# Altium PCB LED_PCB_v1.0.PcbDoc
Units mil, origin at the board's own origin, x right, y up, seen from the top; angles counter-clockwise.
Board outline 3006.97 x 2047.24 mil, 2 copper layers (Top Layer, Bottom Layer), stack 61.811 mil thick; 65 components, 63 nets, 179 pads, 111 vias.
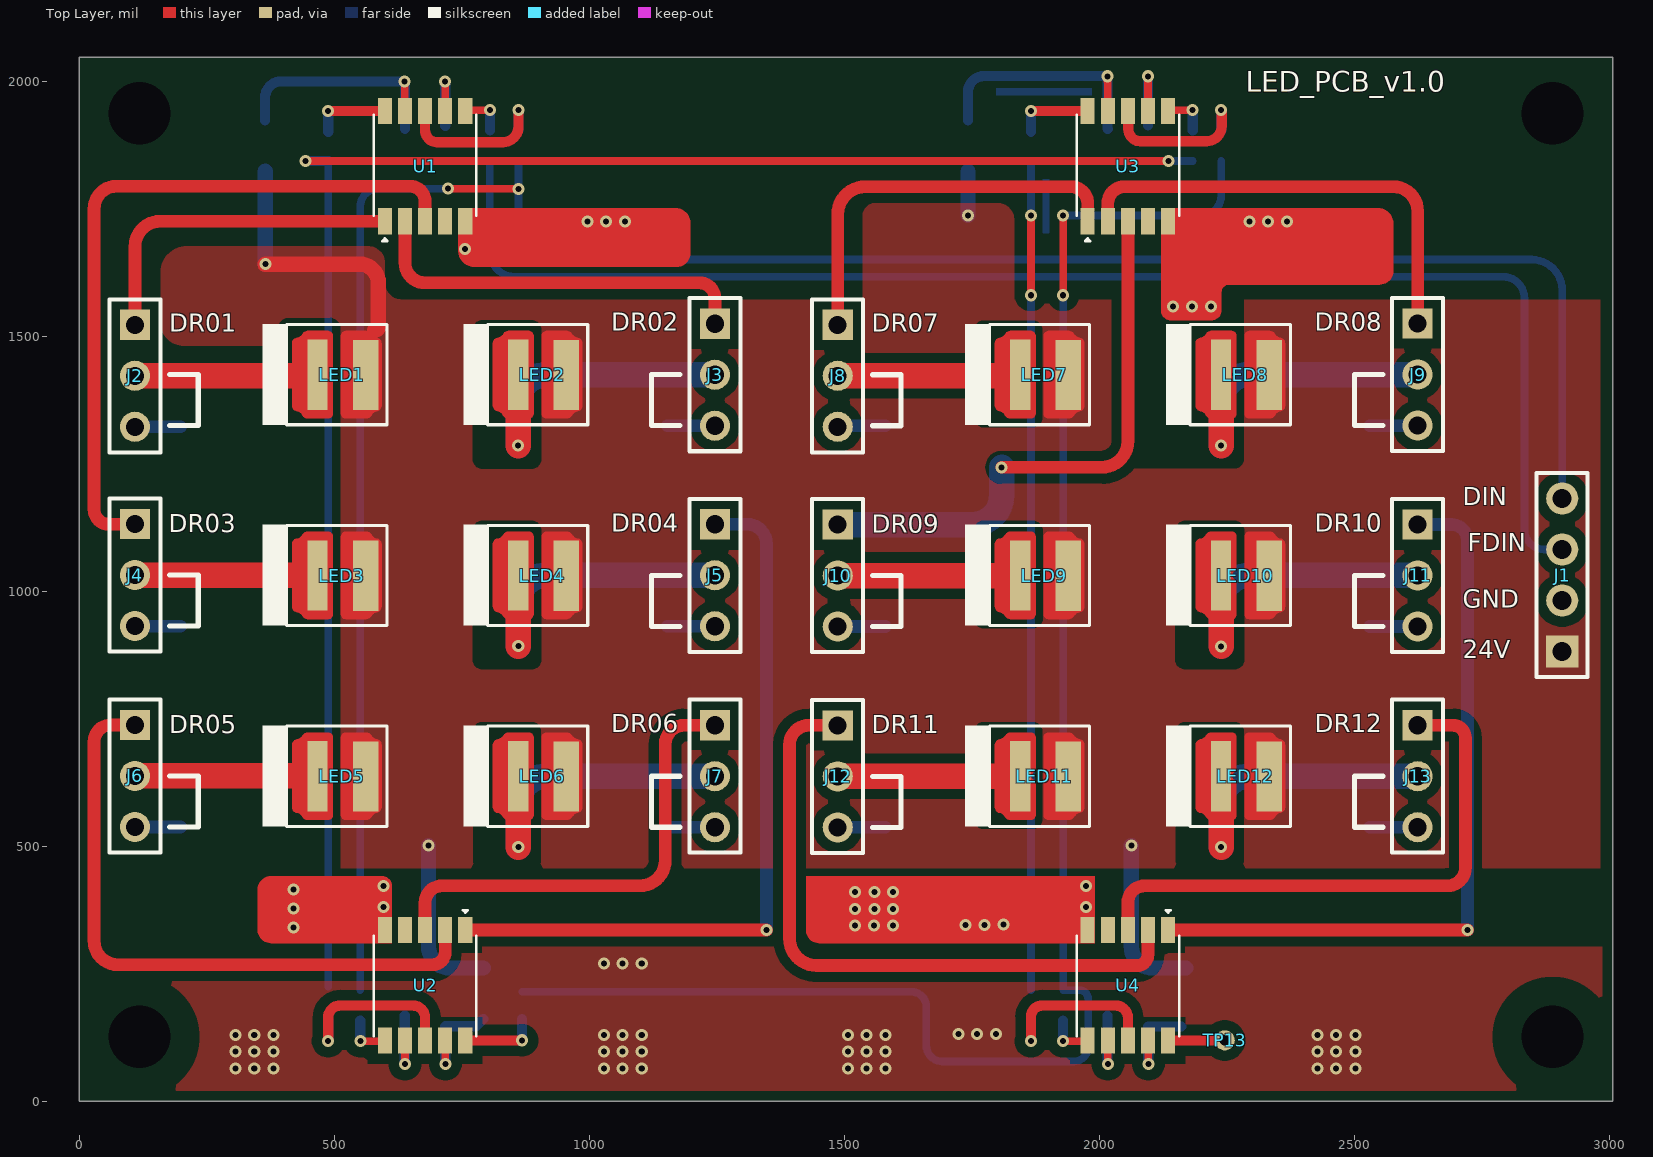
[diagram p0: Top Layer view]
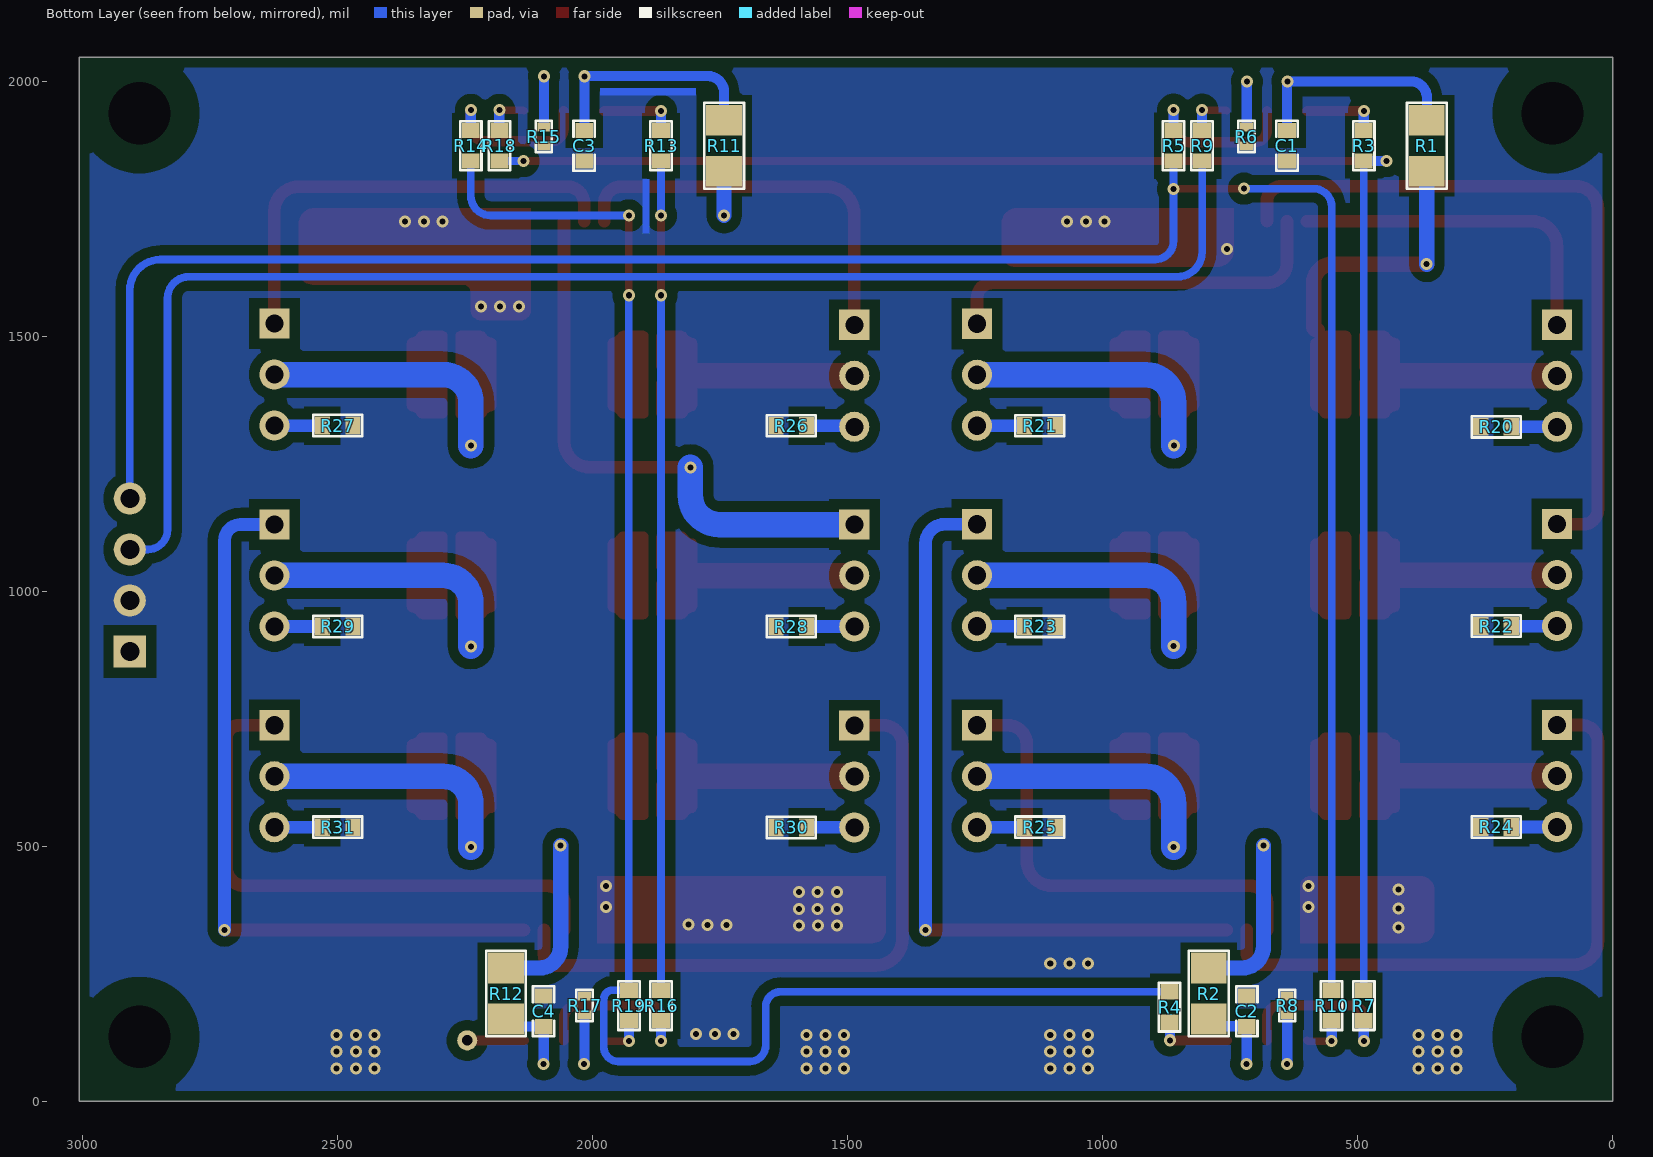
[diagram p1: Bottom Layer view, seen from below]
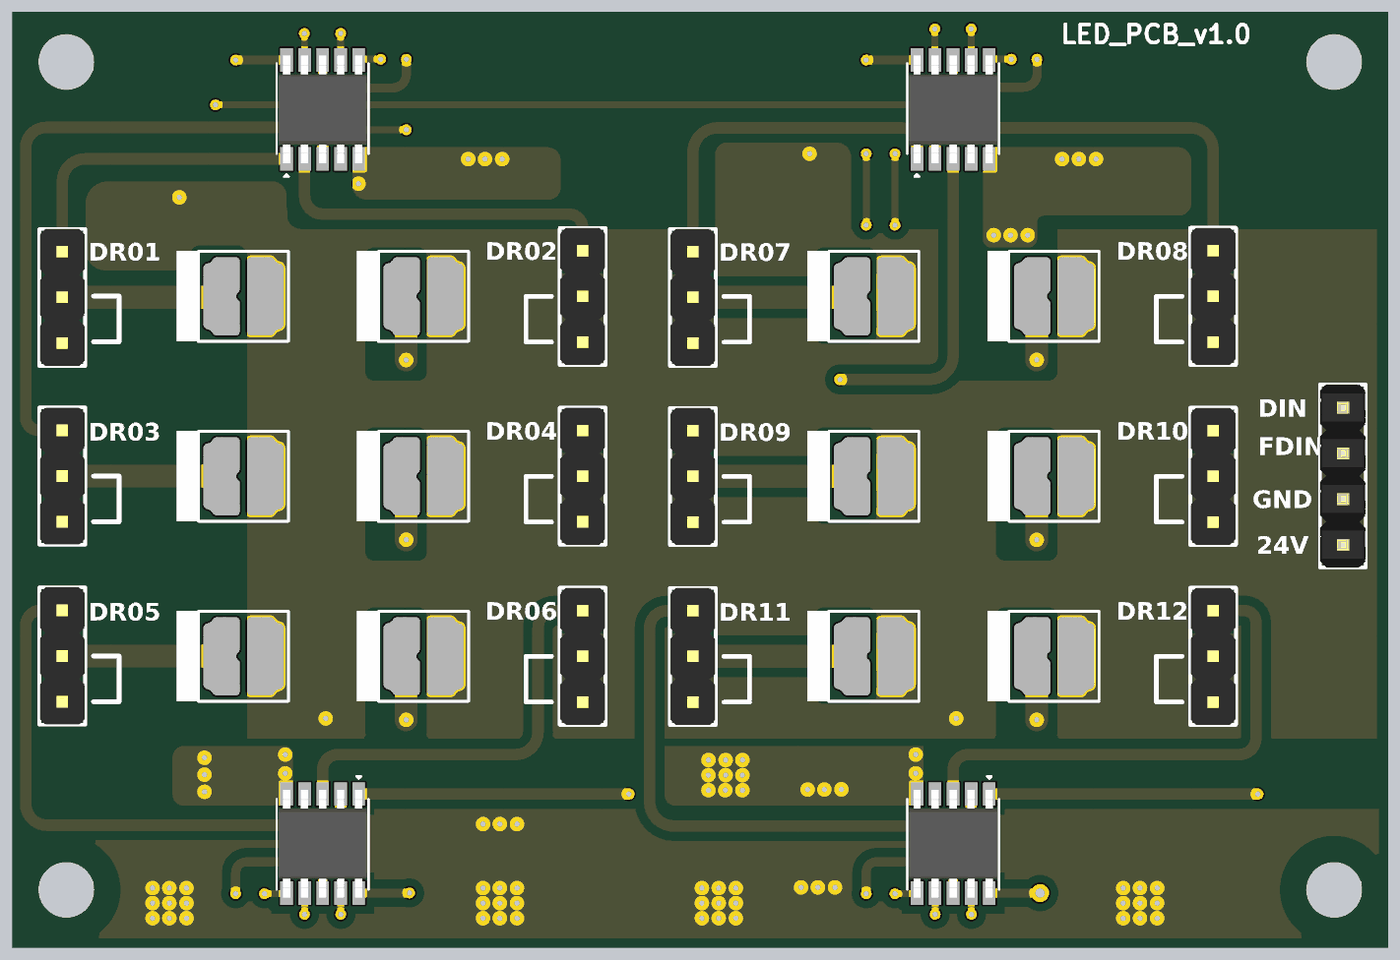
[diagram p2: 3D render of the assembled board from above, using the file's embedded part models]
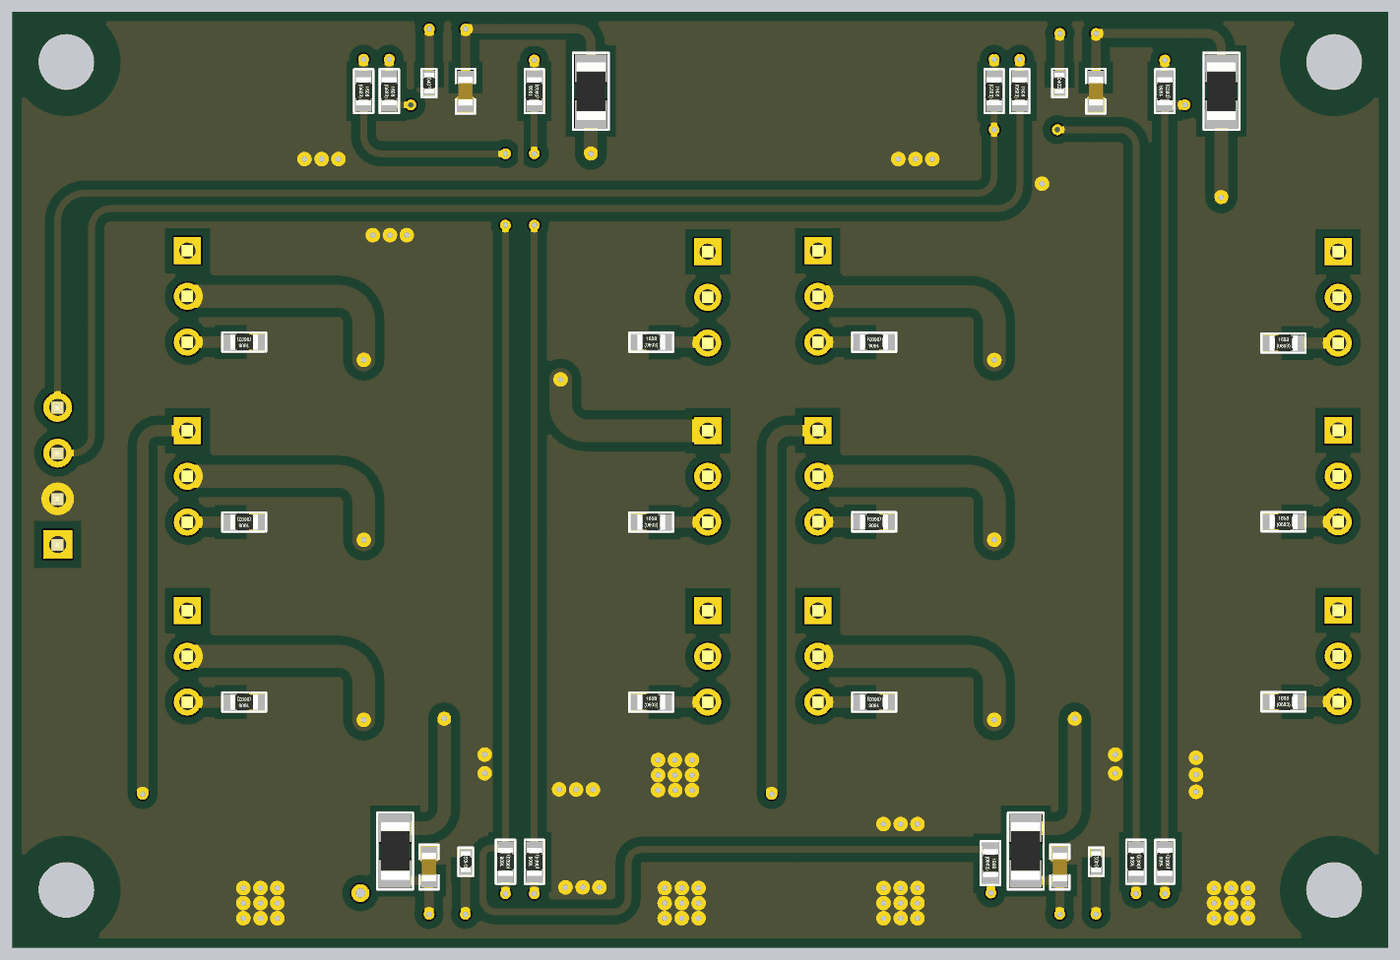
[diagram p3: 3D render of the assembled board from below, using the file's embedded part models]

## Layer stack, top to bottom
Top Solder: solder mask 0.4, Solder Resist, Dk 3.5
Top Layer: signal copper 1.378
Dielectric 1: dielectric 59.055, FR-4, Dk 4.8
Bottom Layer: signal copper 1.378
Bottom Solder: solder mask 0.4, Solder Resist, Dk 3.5

## Board outline
0,0 0,2047.24 3006.97,2047.24 3006.97,0

## Design rules (kind name [scope] priority, off if disabled: settings)
BoardOutlineClearance [All] p1: gap=0 ignorepadtopadclearanceinfootprint=FALSE except(20: Poly-OutlineEdge)
Clearance [All] p1: gap=10 ignorepadtopadclearanceinfootprint=TRUE except(0: Arc-Hole Track-Hole SMDPad-Hole THPad-Hole Via-Hole Fill-Hole Poly-Hole Region-Hole Text-Hole; 20: Arc-Poly Track-Poly SMDPad-Poly THPad-Poly Via-Poly Fill-Poly Poly-Poly)
Height [All] p1: minheight=0 maxheight=2000 prefheight=500
HoleSize [All] p1: absolutevalues=TRUE maxlimit=1000 minlimit=1 maxpercent=80.000 minpercent=20.000
MinimumSolderMaskSliver [All] p1: minsoldermaskwidth=0
PolygonConnect [All] p1: connectstyle=Direct reliefconductorwidth=10 reliefentries=4 polygonreliefangle="90 Angle" airgapwidth=10
RoutingVias [All] p1: holewidth=11.81 width=23.62 viastyle="Through Hole" minholewidth=11.81 minwidth=23.62 maxholewidth=11.81 maxwidth=23.62
SilkToSolderMaskClearance [IsPad] p1: minsilkscreentomaskgap=0 clearancetoexposedcopper=TRUE
SolderMaskExpansion [All] p1: expansion=4 istentingtop=FALSE
SupplyNets "Schematic Supply Nets_1" [InNet('24V')] p1: voltage=0.000
SupplyNets "Schematic Supply Nets" [InNet('GND')] p2: voltage=0.000
UnRoutedNet [All] p1: checkbadconnections=TRUE
Width [All] p1: maxlimit=50 minlimit=8 preferedwidth=10 minimp=50.000000 maximp=50.000000 favimp=50.000000
25 further rules are at their usual default settings.

## Components (designator, comment, footprint, x,y, rotation, side; value= is the part's Value field where it differs from the comment)
C1 "0.1uF" Cap-0603 638.85,1873.64 r90 bottom locked
C2 "0.1uF" Cap-0603 717.6,176.36 r270 bottom
C3 "0.1uF" Cap-0603 2016.8,1873.64 r90 bottom
C4 "0.1uF" Cap-0603 2096.18,176.36 r270 bottom
J1 "X6511WV-04H-C60D30" HDR1X4_ 2907.76,881.96 r90 top
J2 "X6511WV-03H-C60D30" HDR1X3_ 109.27,1522.57 r270 top
J3 "X6511WV-03H-C60D30" HDR1X3_ 1246.43,1524.63 r270 top
J4 "X6511WV-03H-C60D30" HDR1X3_ 109.27,1131.73 r270 top
J5 "X6511WV-03H-C60D30" HDR1X3_ 1246.43,1131.45 r270 top
J6 "X6511WV-03H-C60D30" HDR1X3_ 109.27,738.03 r270 top
J7 "X6511WV-03H-C60D30" HDR1X3_ 1246.43,737.44 r270 top
J8 "X6511WV-03H-C60D30" HDR1X3_ 1487.22,1522.56 r270 top
J9 "X6511WV-03H-C60D30" HDR1X3_ 2624.38,1524.84 r270 top
J10 "X6511WV-03H-C60D30" HDR1X3_ 1487.22,1130.94 r270 top
J11 "X6511WV-03H-C60D30" HDR1X3_ 2624.38,1131.14 r270 top
J12 "X6511WV-03H-C60D30" HDR1X3_ 1487.22,737.24 r270 top
J13 "X6511WV-03H-C60D30" HDR1X3_ 2624.38,737.44 r270 top
LED1 "5050 LED" "5050 LED" 504.32,1424.45 r180 top locked
LED2 "5050 LED" "5050 LED" 898.02,1424.45 r180 top locked
LED3 "5050 LED" "5050 LED" 504.32,1030.75 r180 top locked
LED4 "5050 LED" "5050 LED" 898.02,1030.75 r180 top locked
LED5 "5050 LED" "5050 LED" 504.32,637.05 r180 top locked
LED6 "5050 LED" "5050 LED" 898.02,637.05 r180 top locked
LED7 "5050 LED" "5050 LED" 1882.28,1424.45 r180 top locked
LED8 "5050 LED" "5050 LED" 2275.98,1424.45 r180 top locked
LED9 "5050 LED" "5050 LED" 1882.28,1030.75 r180 top locked
LED10 "5050 LED" "5050 LED" 2275.98,1030.75 r180 top locked
LED11 "5050 LED" "5050 LED" 1882.28,637.05 r180 top locked
LED12 "5050 LED" "5050 LED" 2275.98,637.05 r180 top locked
R1 "2K" Res-1206 364.56,1873.64 r270 bottom value=2kR
R2 "2K" Res-1206 792.11,211.36 r90 bottom value=2kR
R3 "120R" Res-0603 488.23,1873.64 r270 bottom locked
R4 "120R" Res-0603 869.11,184.86 r90 bottom locked
R5 "499R" Res-0603 861.22,1873.64 r90 bottom locked
R6 "4.3K" Res-0402 718.23,1891.64 r270 bottom value=4.3kR
R7 "499R" Res-0603 488.21,187.86 r270 bottom locked
R8 "4.3K" Res-0402 638.21,187.86 r90 bottom locked value=4.3kR
R9 "499R" Res-0603 805.22,1873.64 r90 bottom locked
R10 "499R" Res-0603 551.21,187.86 r270 bottom locked
R11 "2K" Res-1206 1742.51,1873.64 r270 bottom value=2kR
R12 "2K" Res-1206 2170.07,211.36 r90 bottom value=2kR
R13 "120R" Res-0603 1866.18,1873.64 r270 bottom locked
R14 "499R" Res-0603 2239.18,1873.64 r90 bottom locked
R15 "4.3K" Res-0402 2096.18,1891.64 r270 bottom value=4.3kR
R16 "499R" Res-0603 1866.18,187.86 r270 bottom locked
R17 "4.3K" Res-0402 2016.16,187.86 r90 bottom locked value=4.3kR
R18 "499R" Res-0603 2183.18,1873.64 r90 bottom locked
R19 "499R" Res-0603 1929.16,187.86 r270 bottom locked
R20 "680R" Res-0603 228.9,1322.57 r0 bottom
R21 "680R" Res-0603 1123.43,1324.63 r180 bottom
R22 "680R" Res-0603 228.9,931.73 r0 bottom
R23 "680R" Res-0603 1123.43,931.45 r180 bottom
R24 "680R" Res-0603 228.9,538.03 r0 bottom
R25 "680R" Res-0603 1123.43,537.44 r180 bottom
R26 "680R" Res-0603 1610.6,1324.63 r0 bottom
R27 "680R" Res-0603 2500.28,1324.84 r180 bottom
R28 "680R" Res-0603 1610.6,930.94 r0 bottom
R29 "680R" Res-0603 2500.28,931.14 r180 bottom
R30 "680R" Res-0603 1610.6,537.24 r0 bottom
R31 "680R" Res-0603 2500.28,537.44 r180 bottom
TP13 "0.5mm Test Pad" "0.5mm Test Pad" 2246.16,119.47 r270 top locked
U1 "UCS7604" SOP-10 678.22,1833.77 r90 top locked
U2 "UCS7604" SOP-10 678.22,227.73 r270 top locked
U3 "UCS7604" SOP-10 2056.17,1833.77 r90 top locked
U4 "UCS7604" SOP-10 2056.17,227.73 r270 top locked

## Footprints (in the part's own frame and the unit in brackets; to place one, negate y for a bottom-side part, rotate by r counter-clockwise, add the part's x,y. Pads: shape width x height; smd on the part's side, far side on the other; paste and mask are expansions set on the pad)
"0.5mm Test Pad" [mm]
  round 1 hole 0.52: 1(0,0)
"5050 LED" [mm]
  rect 1.27x3.5 smd: A(-1.451,0.005)
  rect 1x3.5 smd: K(0.943,-0.005)
  Top Layer region: 0.403,-2.185 1.444,-2.185 1.512,-2.177 1.576,-2.151 1.631,-2.109 1.673,-2.055 1.728,-1.98 1.728,-1.98 1.729,-1.979 1.73,-1.977 1.731,-1.977 1.799,-1.918 1.799,-1.917 1.8,-1.916 1.801,-1.915 1.802,-1.915 1.881,-1.872 1.882,-1.871 1.883,-1.871 1.884,-1.87 1.885,-1.87 1.972,-1.845 1.972,-1.845 1.973,-1.845 1.975,-1.844 1.975,-1.844 2.033,-1.83 2.087,-1.802 2.134,-1.762 2.17,-1.712 2.194,-1.655 2.204,-1.595 2.204,1.545 2.196,1.609 2.173,1.669 2.138,1.722 2.091,1.766 2.035,1.797 1.975,1.815 1.975,1.815 1.974,1.815 1.972,1.816 1.972,1.816 1.887,1.842 1.887,1.842 1.885,1.842 1.884,1.843 1.884,1.843 1.807,1.887 1.806,1.887 1.805,1.888 1.804,1.888 1.804,1.889 1.738,1.948 1.738,1.949 1.737,1.95 1.736,1.951 1.736,1.951 1.684,2.025 1.64,2.083 1.582,2.128 1.515,2.155 1.444,2.165 0.403,2.165 0.347,2.158 0.293,2.136 0.248,2.101 0.213,2.055 0.191,2.002 0.184,1.945 0.184,0.365 0.19,0.31 0.21,0.258 0.241,0.212 0.282,0.177 0.282,0.177 0.284,0.175 0.285,0.174 0.285,0.174 0.33,0.134 0.33,0.134 0.331,0.133 0.332,0.132 0.332,0.131 0.364,0.08 0.365,0.08 0.365,0.078 0.366,0.077 0.366,0.077 0.382,0.019 0.383,0.019 0.383,0.017 0.383,0.016 0.383,0.015 0.383,-0.045 0.383,-0.045 0.383,-0.047 0.383,-0.048 0.382,-0.049 0.366,-0.106 0.366,-0.107 0.365,-0.108 0.365,-0.109 0.364,-0.11 0.332,-0.161 0.332,-0.161 0.331,-0.162 0.33,-0.163 0.33,-0.164 0.285,-0.203 0.285,-0.203 0.284,-0.205 0.282,-0.206 0.282,-0.206 0.242,-0.239 0.211,-0.282 0.191,-0.332 0.184,-0.385 0.184,-1.965 0.191,-2.022 0.213,-2.075 0.248,-2.12 0.293,-2.155 0.347,-2.177 0.403,-2.185
  Top Layer region: -1.487,-2.185 -0.457,-2.185 -0.397,-2.177 -0.342,-2.154 -0.294,-2.117 -0.257,-2.07 -0.234,-2.014 -0.226,-1.955 -0.226,1.945 -0.235,2.003 -0.259,2.057 -0.296,2.103 -0.343,2.137 -0.398,2.159 -0.457,2.165 -1.487,2.165 -1.558,2.155 -1.625,2.128 -1.683,2.083 -1.727,2.025 -1.781,1.951 -1.781,1.95 -1.782,1.949 -1.783,1.948 -1.784,1.948 -1.852,1.888 -1.852,1.887 -1.853,1.887 -1.854,1.886 -1.855,1.886 -1.934,1.842 -1.934,1.842 -1.936,1.841 -1.937,1.841 -1.938,1.841 -2.027,1.815 -2.086,1.796 -2.141,1.764 -2.186,1.72 -2.219,1.667 -2.24,1.608 -2.247,1.545 -2.247,-1.565 -2.241,-1.629 -2.221,-1.69 -2.187,-1.745 -2.142,-1.79 -2.087,-1.824 -2.027,-1.845 -1.938,-1.87 -1.937,-1.87 -1.936,-1.871 -1.934,-1.871 -1.934,-1.872 -1.855,-1.915 -1.854,-1.915 -1.853,-1.916 -1.852,-1.917 -1.852,-1.918 -1.784,-1.977 -1.783,-1.977 -1.782,-1.979 -1.781,-1.98 -1.781,-1.98 -1.727,-2.055 -1.682,-2.11 -1.624,-2.152 -1.557,-2.178 -1.487,-2.185
  silkscreen extent -2.52,-2.54 3.68,2.49
Cap-0603 [mil]
  rect 30x35 smd mask+2.36: 1(-30,0) 2(30,0)
  silkscreen extent -49,-21 49,21, body extent -32,-16 31,16, height 34
HDR1X3_ [mm] "Connector; Header; 3 Position"
  rect 1.5x1.5 hole 0.9: 1(0,0)
  round 1.5 hole 0.9: 2(2.54,0) 3(5.08,0)
  silkscreen extent -1.27,-1.27 6.35,1.27, body extent -1.27,-1.24 6.35,1.25, height 8.54
HDR1X4_ [mm] "Connector; Header; 4 Position"
  rect 1.6x1.6 hole 0.95: 1(0,0)
  round 1.6 hole 0.95: 2(2.54,0) 3(5.08,0) 4(7.62,0)
  silkscreen extent -1.27,-1.27 8.89,1.27, body extent -1.27,-1.27 8.89,1.27, height 9.5
Res-0402 [mil]
  rect 18x25 smd mask+2.17: 1(-18.5,0) 2(18.5,0)
  silkscreen extent -32,-17 32,16, body extent -23,-11 23,11, height 16
Res-0603 [mil]
  rect 30x35 smd: 1(-30,0) 2(30,0)
  silkscreen extent -48,-21 48,21, body extent -31,-17 31,17, height 18
Res-1206 [mil]
  rect 60x70 smd: 1(-50,0) 2(50,0)
  silkscreen extent -84,-39 84,39, body extent -63,-31 63,31, height 24
SOP-10 [mm]
  rect 1.3x0.7 smd: 1(-2.75,2) 2(-2.75,1) 3(-2.75,0) 4(-2.75,-1) 5(-2.75,-2) 6(2.75,-2) 7(2.75,-1) 8(2.75,0) 9(2.75,1) 10(2.75,2)
  silkscreen extent -3.73,-2.55 2.55,2.55, body extent -3,-2.45 3,2.45, height 1.76

## Part data
C1 C2 C3 C4: library part CC0603JRX7R9BB104, "CAP CER 0.1UF 50V X7R 0603", LCSC Part Number=C91183, Manufacturer=Yageo, ComponentLink1Description=https://datasheet.ciiva.com/11465/upy-gphc-x7r-6-3v-to-50v-8-11465038.pdf?src-supplier=Avnet, ComponentLink1URL=https://datasheet.ciiva.com/11465/upy-gphc-x7r-6-3v-to-50v-8-11465038.pdf?src-supplier=Avnet, Halogen Free=5694HalogenFree, Item Type=Capacitors, Lead Free=5697LeadFree, Manufacturer Part Number=CC0603JRX7R9BB104, Material=4241ConductorMaterial, Pins=2NUMBER, Pricing="4000=0.0077, 16000=0.0073, 60000=0.007, 160000=0.0068, 400000=0.0064 (USD)", RoHS=Yes, Stock=204000, Supplier="Future Electronics"
J1: "Gold 250V 3A Straight Square Pins 2.5mm 4P 260℃ 6mm -40℃~+105℃ 3mm 2.54mm Plugin Black Brass 1x4P Plugin,P=2.54mm Pin Headers ROHS", LCSC Part Number=C706876, Manufacturer=XKB, Package=Plugin,P=2.54mm, ComponentLink1Description=LCSC, ComponentLink1URL=https://www.lcsc.com/product-detail/Pin-Headers_XKB-Connectivity-X6511WV-04H-C60D30_C706876.html, Item Type="Male Header", Manufacturer Part Number=X6511WV-04H-C60D30
J2 J3 J4 J5 J6 J7 J8 J9 J10 J11 J12 J13: "Gold 250V 3A Straight Square Pins 2.5mm 3P 260℃ 6mm -40℃~+105℃ 3mm 2.54mm Plugin Black Brass 1x3P Plugin,P=2.54mm Pin Headers ROHS", LCSC Part Number=C706875, Manufacturer=XKB, Package=Plugin,P=2.54mm, ComponentLink1Description=LCSC, ComponentLink1URL=https://www.lcsc.com/product-detail/Pin-Headers_XKB-Connectivity-X6511WV-03H-C60D30_C706875.html, Item Type="Male Header", Manufacturer Part Number=X6511WV-03H-C60D30
LED1 LED2 LED3 LED4 LED5 LED6 LED7 LED8 LED9 LED10 LED11 LED12: "-", ComponentLink1Description=LCSC
R1 R2 R11 R12: library part RC1206FR-072KL, "RES 2K OHM 1% 1/4W 1206", Case Code (Imperial)=1206, Case Code (Metric)=3216, LCSC Part Number=C133543, Manufacturer=Yageo, Max Operating Temperature=155°C, Max Power Dissipation=250mW, Min Operating Temperature=-55°C, Temperature Coefficient=100ppm/°C, Tolerance=1%, Voltage Rating=200V, Case/Package=1206, ComponentLink1Description=https://datasheet.ciiva.com/11808/0900766b80c6630a-11808949.pdf?src-supplier=Rs, ComponentLink1URL=https://datasheet.ciiva.com/11808/0900766b80c6630a-11808949.pdf?src-supplier=Rs, ComponentLink2Description=https://datasheet.ciiva.com/16740/pyu-rc1206-51-rohs-l-4-16740842.pdf?src-supplier=Future+Electronics, ComponentLink2URL=https://datasheet.ciiva.com/16740/pyu-rc1206-51-rohs-l-4-16740842.pdf?src-supplier=Future+Electronics, Depth=1.6mm, Features="Moisture Resistant", Height=0.55mm, Item Type=Resistors, Lead Free=5697LeadFree, Length=3.1mm, Manufacturer Part Number=RC1206FR-072KL, Mounting Technology="Surface Mount", Number of Terminations=2, Packaging="Tape and Reel", Power Rating=250mW, Pricing="5000=0.003, 20000=0.0029, 75000=0.0028, 150000=0.0027, 375000=0.0026 (USD)", RoHS=Yes, RoHS Compliant=Yes, Series=RC, Stock=45000, Supplier="Future Electronics", Technology="THICK FILM", Termination=SMD/SMT, Voltage Rating (DC)=200V, Width=1.6mm, Working Voltage=200V
R3 R4 R13: library part RC0603FR-07120RL, "RES 120 OHM 1% 1/10W 0603", Case Code (Imperial)=0603, Case Code (Metric)=1608, LCSC Part Number=C114640, Manufacturer=Yageo, Max Operating Temperature=155°C, Max Power Dissipation=100mW, Min Operating Temperature=-55°C, Package Quantity=1, Resistance Tolerance=1%, Resistor Type="Thick Film", Supplier Part Number 1=311-120HRCT-ND, Temperature Coefficient=100ppm/°C, Voltage Rating=50V, Case/Package=0603, Category="Chip SMD Resistors", ComponentLink1Description=https://datasheet.ciiva.com/2553/pyu-r-int-thick-7-2553512.pdf?src-supplier=Digi-Key, ComponentLink1URL=https://datasheet.ciiva.com/2553/pyu-r-int-thick-7-2553512.pdf?src-supplier=Digi-Key, ComponentLink2Description=https://datasheet.ciiva.com/7746/443971-7746248.pdf?src-supplier=Element14, ComponentLink2URL=https://datasheet.ciiva.com/7746/443971-7746248.pdf?src-supplier=Element14, ComponentLink3Description=https://datasheet.ciiva.com/2553/pyu-r-int-thick-7-2553513.pdf?src-supplier=Digi-Key, ComponentLink3URL=https://datasheet.ciiva.com/2553/pyu-r-int-thick-7-2553513.pdf?src-supplier=Digi-Key, ComponentLink4Description=https://datasheet.ciiva.com/7746/443971-7746249.pdf?src-supplier=Element14, ComponentLink4URL=https://datasheet.ciiva.com/7746/443971-7746249.pdf?src-supplier=Element14, ComponentLink5Description=https://datasheet.ciiva.com/2553/pyu-r-int-thick-7-2553514.pdf?src-supplier=Digi-Key, ComponentLink5URL=https://datasheet.ciiva.com/2553/pyu-r-int-thick-7-2553514.pdf?src-supplier=Digi-Key, ComponentLink6Description=https://datasheet.ciiva.com/46395/443971-46395021.pdf?src-supplier=Element14, ComponentLink6URL=https://datasheet.ciiva.com/46395/443971-46395021.pdf?src-supplier=Element14, Construction=Rectangular, Depth=0.8mm, Features="Moisture Resistant", Height=0.022inch, Item Type=Resistor, Lead Free="Lead Free", Length=1.6mm, Manufacturer Part Number=RC0603FR-07120RL, Military Standard=Not, Number of Pins=2, Number of Terminations=2, Packaging="Tape and Reel", Power Rating=100mW, Pricing 1="1=0.10000, 10=0.02400, 100=0.00970, 1000=0.00436, 2500=0.00378 (USD)", REACH SVHC="No SVHC", Resistance=120R, RoHS=Yes, RoHS Compliant=Yes, Series=RC, Size Code=0603, Stock 1=839061, Supplier 1=Digi-Key, Termination=SMD/SMT, Tolerance=1%, Voltage Rating (DC)=50V, Width=0.031inch
R5 R7 R9 R10 R14 R16 R18 R19: library part RC0603FR-07499RL, "RES 499 OHM 1% 1/10W 0603", Case Code (Imperial)=0603, Case Code (Metric)=1608, LCSC Part Number=C137714, Manufacturer=Yageo, Max Operating Temperature=155°C, Max Power Dissipation=100mW, Min Operating Temperature=-55°C, Package Quantity=1, Resistor Type="Thick Film", Supplier Part Number 1=1995585, Temperature Coefficient=100ppm/°C, Tolerance=1%, Voltage Rating=50V, Case/Package=0603, Category="Chip SMD Resistors", ComponentLink1Description=https://datasheet.ciiva.com/11808/0900766b80f96399-11808558.pdf?src-supplier=RSComponents, ComponentLink1URL=https://datasheet.ciiva.com/11808/0900766b80f96399-11808558.pdf?src-supplier=RSComponents, ComponentLink2Description=https://datasheet.ciiva.com/2453/pyu-r-int-thick-7-2453956.pdf?src-supplier=Digi-Key, ComponentLink2URL=https://datasheet.ciiva.com/2453/pyu-r-int-thick-7-2453956.pdf?src-supplier=Digi-Key, ComponentLink3Description=https://datasheet.ciiva.com/2453/pyu-r-int-thick-7-2453957.pdf?src-supplier=Digi-Key, ComponentLink3URL=https://datasheet.ciiva.com/2453/pyu-r-int-thick-7-2453957.pdf?src-supplier=Digi-Key, ComponentLink4Description=https://datasheet.ciiva.com/2453/pyu-r-int-thick-7-2453955.pdf?src-supplier=Digi-Key, ComponentLink4URL=https://datasheet.ciiva.com/2453/pyu-r-int-thick-7-2453955.pdf?src-supplier=Digi-Key, ComponentLink5Description=https://datasheet.ciiva.com/12558/rc0603-272842-12558391.pdf?src-supplier=Mouser, ComponentLink5URL=https://datasheet.ciiva.com/12558/rc0603-272842-12558391.pdf?src-supplier=Mouser, ComponentLink6Description=https://datasheet.ciiva.com/8885/pyu-rc0603-51-rohs-l-4-8885483.pdf?src-supplier=Avnet, ComponentLink6URL=https://datasheet.ciiva.com/8885/pyu-rc0603-51-rohs-l-4-8885483.pdf?src-supplier=Avnet, Construction=Rectangular, Contact Plating=Tin,Matte, Depth=0.8mm, Features="Moisture Resistant", Height=0.45mm, Lead Free="Lead Free", Length=1.6mm, Manufacturer Part Number=RC0603FR-07499RL, Military Standard=Not, Mount="Surface Mount", Number of Terminations=2, Packaging="Tape and Reel", Power Rating=100mW, Pricing 1="5000=0.00300, 10000=0.00300, 15000=0.00300, 20000=0.00200 (GBP)", Radiation Hardening=No, Resistance=499R, RoHS=Yes, RoHS Compliant=Yes, Series=RC, Size Code=0603, Stock 1=900, Supplier 1=RSComponents, Technology="THICK FILM", Termination=SMD/SMT, Voltage Rating (DC)=50V, Width=0.031inch
R6 R8 R15 R17: library part RC0402FR-074K3L, "RES 4.3K OHM 1% 1/16W 0402", Case Code (Imperial)=0402, Case Code (Metric)=1005, LCSC Part Number=C477725, Manufacturer=Yageo, Max Operating Temperature=155°C, Max Power Dissipation=63mW, Min Operating Temperature=-55°C, Resistance Tolerance=1%, Resistor Type="Thick Film", Temperature Coefficient=100ppm/°C, Voltage Rating=50V, Case/Package=0402, ComponentLink1Description=https://datasheet.ciiva.com/7850/1018594-7850021.pdf?src-supplier=Element14, ComponentLink1URL=https://datasheet.ciiva.com/7850/1018594-7850021.pdf?src-supplier=Element14, ComponentLink2Description=https://datasheet.ciiva.com/12666/pyu-rc0402-51-rohs-l-6-r-12666953.pdf?src-supplier=Mouser, ComponentLink2URL=https://datasheet.ciiva.com/12666/pyu-rc0402-51-rohs-l-6-r-12666953.pdf?src-supplier=Mouser, ComponentLink3Description=https://datasheet.ciiva.com/8893/pyu-rc0402-51-rohs-l-6-8893173.pdf?src-supplier=Avnet, ComponentLink3URL=https://datasheet.ciiva.com/8893/pyu-rc0402-51-rohs-l-6-8893173.pdf?src-supplier=Avnet, ComponentLink4Description=https://datasheet.ciiva.com/17086/pyu-rc0402-51-rohs-l-6-r-17086539.pdf?src-supplier=Future+Electronics, ComponentLink4URL=https://datasheet.ciiva.com/17086/pyu-rc0402-51-rohs-l-6-r-17086539.pdf?src-supplier=Future+Electronics, Construction=Rectangular, Contact Plating=Tin,Matte, Depth=0.5mm, Features="Moisture Resistant", Item Type=Resistors, Lead Free="Lead Free", Length=1mm, Manufacturer Part Number=RC0402FR-074K3L, Military Standard=Not, Number of Terminations=2, Packaging="Tape and Reel", Power Rating=63mW, Pricing="10000=0.0005, 100000=0.0005, 300000=0.0004, 750000=0.0004, 2000000=0.0004 (USD)", Reach SVHC Compliant=Unknown, RoHS=Yes, RoHS Compliant=Yes, Series=RC, Stock=200000, Supplier="Future Electronics", Termination=SMD/SMT, Tolerance=1%, Voltage Rating (DC)=50V
R20 R21 R22 R23 R24 R25 R26 R27 R28 R29 R30 R31: library part RC0603FR-07680RL, "RES SMD 680 OHM 1% 1/10W 0603", LCSC Part Number=C112310, Manufacturer=Yageo, Package=0603, ComponentLink4Description=LCSC, ComponentLink4URL=https://www.lcsc.com/product-detail/Chip-Resistor-Surface-Mount_YAGEO-RC0603FR-07680RL_C112310.html, Item Type=Resistor, Manufacturer Part Number=RC0603FR-07680RL
TP13: "Test pad"
U1 U2 U3 U4: "RGBW LED Driver", LCSC Part Number=-, Manufacturer=UCS, Package=SOP-10, ComponentLink1Description=UCS, ComponentLink1URL=https://suntechlite.com/ucs7604-specification-sheet-download/, Item Type=IC, Manufacturer Part Number=UCS7604

## Free pads (board coordinates)
  round 0 hole 122.05 unplated: MH(118.11,126.45) MH(118.11,1937.47) MH(2888.86,126.45) MH(2888.86,1937.47)

## Via types
v1: diameter 23.62, hole 11.81, Top Layer to Bottom Layer, 111 vias

## Nets (pads, with @x,y where several pads share a name; then routed paths per layer and width w, separated by ;. In a path a pad name is that pad's centre, name@x,y a point inside that pad or via, vN(x,y) a via of type N, cw(c..) or ccw(c..) an arc to the next point about the centre after c; other vN are vias at no path point)
24V: J1.1 LED1.A LED2.A LED3.A LED4.A LED5.A LED6.A LED7.A LED8.A LED9.A LED10.A LED11.A LED12.A R1.2 R2.2 R11.2 R12.2 | length 1266.9
  Top Layer w30: v1(365,1641.45) 549.85,1641.45 cw(c549.85,1604.8) 586.51,1604.8 586.51,1519.41 cw(c578.91,1519.41) 578.91,1511.81
  Bottom Layer w30: v1@364.56,1641.45 R1.2 ; v1(685,501.45) 685,303.6 ccw(c727.24,303.6) 727.24,261.36 R2.2 ; v1(1742.51,1736.8) R11.2 ; v1(2062.95,501.45) 2062.95,303.6 ccw(c2105.19,303.6) 2105.19,261.36 R12.2
DIN: J1.4 R5.1 R10.1 | length 4533.6
  Top Layer w15: v1(723,1789.45) 861.22,1789.45 v1(861.22,1789.27)
  Bottom Layer w15: R10.1 551.21,1646.24 551,1646.45 551,1753.83 cw(c586.62,1753.83) 586.62,1789.45 v1(723,1789.45) ; R5.1 v1(861.22,1789.27) 861.22,1686.86 ccw(c897.63,1686.86) 897.63,1650.45 2847.66,1650.45 cw(c2847.66,1590.35) 2907.76,1590.35 J1.4
DRV_1: J2.1 U1.1 | length 671.7
  Top Layer w25: J2.1 109.27,1675.64 cw(c159.12,1675.64) 159.12,1725.5 U1.1
DRV_2: J3.1 U1.2 | length 778.6
  Top Layer w25: U1.2 638.85,1644.17 ccw(c678.22,1644.17) 678.22,1604.8 1216.26,1604.8 cw(c1216.26,1574.63) 1246.43,1574.63 J3.1
DRV_3: J4.1 U1.3 | length 1415.8
  Top Layer w25: J4.1 57.22,1131.73 cw(c57.14,1158.88) 41.21,1136.89 cw(c58.17,1160.31) 29.25,1160.31 29.25,1160.37 29.25,1750.08 cw(c73.6,1750.08) 73.6,1794.43 648.36,1794.43 cw(c648.36,1764.57) 678.22,1764.57 U1.3@678.22,1726.29
DRV_4: J5.1 U2.1 | length 1470.9
  Top Layer w25: U2.1 v1(1347.46,336)
  Bottom Layer w25: J5.1 1309.94,1131.45 cw(c1309.94,1093.93) 1347.46,1093.93 v1(1347.46,336)
DRV_5: J6.1 U2.2 | length 1262
  Top Layer w25: J6.1 62.07,738.03 ccw(c62.07,705.21) 29.25,705.21 29.25,314.58 ccw(c75.97,314.58) 75.97,267.86 692.98,267.86 ccw(c692.98,292.47) 717.59,292.47 U2.2
DRV_6: J7.1 U2.3 | length 917.9
  Top Layer w25: U2.3 678.22,389.27 cw(c711.4,389.27) 711.4,422.45 1099.25,422.45 ccw(c1099.25,472.2) 1149,472.2 1149,699.92 cw(c1186.52,699.92) 1186.52,737.44 J7.1
DRV_7: J8.1 U3.1 | length 791.4
  Top Layer w25: J8.1 1487.22,1739.02 cw(c1541.66,1739.02) 1541.66,1793.45 1944.23,1793.45 cw(c1944.23,1760.25) 1977.43,1760.25 U3.1
DRV_8: J9.1 U3.2 | length 909.3
  Top Layer w25: U3.2 2016.8,1760.25 cw(c2050,1760.25) 2050,1793.45 2576.46,1793.45 cw(c2576.46,1745.53) 2624.38,1745.53 J9.1
DRV_9: J10.1 U3.3 | length 1116.8
  Top Layer w25: v1(1808.72,1243.05) 1808.9,1243.23 2005,1243.23 ccw(c2005,1294.4) 2056.17,1294.4 U3.3
  Bottom Layer w50: J10.1 1751.36,1130.94 ccw(c1751.36,1188.3) 1808.72,1188.3 v1(1808.72,1243.05)
DRV_10: J11.1 U4.1 | length 1466.2
  Top Layer w25: U4.1 v1(2722,336)
  Bottom Layer w25: J11.1 2690.27,1131.14 cw(c2690.27,1099.41) 2722,1099.41 v1(2722,336)
DRV_11: J12.1 U4.2 | length 1289.7
  Top Layer w25: J12.1 1430.75,737.24 ccw(c1430.75,699.28) 1392.8,699.28 1392.8,319.33 ccw(c1445.91,319.33) 1445.91,266.21 2074.06,266.21 ccw(c2074.06,287.69) 2095.54,287.69 U4.2
DRV_12: J13.1 U4.3 | length 1116.5
  Top Layer w25: U4.3 2056.17,389.27 cw(c2089.35,389.27) 2089.35,422.45 2682,422.45 ccw(c2682,458.45) 2718,458.45 2718,712.45 ccw(c2693.01,712.45) 2693.01,737.44 J13.1
FDIN: J1.3 R9.1 | length 2808.6
  Bottom Layer w15: R9.1 805.22,1665.6 ccw(c853.96,1665.6) 853.96,1616.86 2791.7,1616.86 cw(c2791.7,1574.83) 2833.73,1574.83 2833.73,1120.89 ccw(c2872.65,1120.89) 2872.65,1081.96 J1.3
GND: C1.1 C2.1 C3.1 C4.1 J1.2 R6.2 R8.2 R15.2 R17.2 R20.2 R21.2 R22.2 R23.2 R24.2 R25.2 R26.2 R27.2 R28.2 R29.2 R30.2 R31.2 U1.5 U2.5 U3.5 U4.5 | length 1004.1
  Top Layer w25: v1@420,336 U2.5 v1@599.48,381.45 ; v1@756.96,1671.65 U1.5 915.96,1725.5 ; v1@1812.33,336 U4.5 1977.43,401.45 ; 2134.91,1548.69 U3.5 v1@2293.91,1725.5
  other v1: 306.52,64.45 343.22,64.45 380.75,64.45 1028.77,64.45 1065.47,64.45 1103,64.45 1507.1,64.45 1543.8,64.45 1581.33,64.45 2427.84,64.45 2464.55,64.45 2502.08,64.45 306.52,97.45 343.22,97.45 380.75,97.45 1028.77,97.45 1065.47,97.45 1103,97.45 1507.1,97.45 1543.8,97.45 1581.33,97.45 2427.84,97.45 2464.55,97.45 2502.08,97.45 306.52,130.45 343.22,130.45 380.75,130.45 1028.77,130.45 1065.47,130.45 1103,130.45 1507.1,130.45 1543.8,130.45 1581.33,130.45 2427.84,130.45 2464.55,130.45 2502.08,130.45 1723.77,131.95 1760.47,131.95 1798,131.95 1028.77,270.45 1065.47,270.45 1103,270.45 420,341 1521.43,344.5 1558.14,344.5 1595.67,344.5 1738.1,346 1774.8,346 1811.93,346.4 1521.43,377.5 1558.96,377.5 1595.67,377.5 420,378.45 596.48,381.45 1974.43,381.45 1521.43,410.5 1558.96,410.5 1595.67,410.5 420,415.45 596.48,422.45 1974.43,422.45 2144.91,1558.69 2181.62,1558.69 2219.15,1558.69 756.56,1671.25 996.35,1725.1 1033.06,1725.1 1070.59,1725.1 2294.31,1725.1 2331.01,1725.1 2368.54,1725.1
LED1: J2.2 LED1.K | length 326.9
  Top Layer w50: J2.2 436.16,1422.57
LED2: J3.2 LED2.K | length 592.1
  Top Layer w50: v1@860.88,1285.85 LED2.K@860.88,1376.86
  Bottom Layer w15: J3.2@1246.33,1424.54 J3.2
  Bottom Layer w50: v1(860.79,1285.55) 860.79,1369.68 cw(c915.65,1369.68) 915.65,1424.54 J3.2@1246.33,1424.54
LED3: J4.2 LED3.K | length 326.9
  Top Layer w50: J4.2 436.16,1031.73
LED4: J5.2 LED4.K | length 592
  Top Layer w50: v1@860.88,892.15 LED4.K@860.88,983.16
  Bottom Layer w50: v1(860.88,892.46) 860.88,976.59 cw(c915.74,976.59) 915.74,1031.45 J5.2
LED5: J6.2 LED5.K | length 326.9
  Top Layer w50: J6.2 436.16,638.03
LED6: J7.2 LED6.K | length 592
  Top Layer w50: v1(860.88,498.45) LED6.K@860.88,589.46
  Bottom Layer w50: v1(860.88,498.45) 860.88,582.58 cw(c915.74,582.58) 915.74,637.44 J7.2
LED7: J8.2 LED7.K | length 350.3
  Top Layer w20: 1814.12,1422.56 ccw(c1814.12,1424.84) 1816.39,1424.84
  Top Layer w40: 1814.12,1422.56 LED7.K@1833.96,1422.56
  Top Layer w50: J8.2 1814.12,1422.56
LED8: J9.2 LED8.K | length 592
  Top Layer w50: v1(2238.83,1285.85) LED8.K@2238.83,1376.86
  Bottom Layer w50: v1(2238.83,1285.85) 2238.83,1369.98 cw(c2293.69,1369.98) 2293.69,1424.84 J9.2
LED9: J10.2 LED9.K | length 350.3
  Top Layer w20: 1814.12,1030.94 ccw(c1814.12,1033.21) 1816.39,1033.21
  Top Layer w40: 1814.12,1030.94 LED9.K@1833.96,1030.94
  Top Layer w50: J10.2 1814.12,1030.94
LED10: J11.2 LED10.K | length 592
  Top Layer w50: v1(2238.83,892.15) LED10.K@2238.83,983.16
  Bottom Layer w50: v1(2238.83,892.15) 2238.83,976.28 cw(c2293.69,976.28) 2293.69,1031.14 J11.2
LED11: J12.2 LED11.K | length 350.3
  Top Layer w20: 1814.12,637.24 ccw(c1814.12,639.51) 1816.39,639.51
  Top Layer w40: 1814.12,637.24 LED11.K@1833.96,637.24
  Top Layer w50: J12.2 1814.12,637.24
LED12: J13.2 LED12.K | length 592
  Top Layer w50: v1(2238.83,498.45) LED12.K@2238.83,589.46
  Bottom Layer w50: v1(2238.83,498.45) 2238.83,582.58 cw(c2293.69,582.58) 2293.69,637.44 J13.2
NetC1_2: C1.2 R1.1 U1.9 | length 488.1
  Top Layer w15: v1(638.21,1999.88) 638.53,1999.56 638.53,1942.35 U1.9
  Bottom Layer w20: R1.1 364.56,1968.45 cw(c395.99,1968.45) 395.99,1999.88 v1(638.21,1999.88) 638.53,1999.56 638.53,1906.84 C1.2@638.85,1906.52
NetC2_2: C2.2 R2.1 U2.9 | length 200.7
  Top Layer w15: U2.9 717.91,119.15 v1@717.91,73.19 ; v1@717.91,72.93 v1(717.97,73)
  Bottom Layer w20: v1(717.97,73) 717.6,73.38 C2.2 718.4,147.16 777.91,147.16 R2.1
NetC3_2: C3.2 R11.1 U3.9 | length 508
  Top Layer w15: v1@2016.16,1999.88 2016.48,1999.56 2016.48,1942.35 U3.9
  Bottom Layer w20: R11.1 1742.51,1978.45 cw(c1774.26,1978.45) 1774.26,2010.2 v1@2015.84,2010.2 ; v1(2016.16,2009.88) 2016.48,2009.56 2016.48,1906.84 C3.2@2016.8,1906.52
NetC4_2: C4.2 R12.1 U4.9 | length 186.1
  Top Layer w15: U4.9 2095.86,119.15 v1@2095.86,77.31 ; v1@2095.86,72.44 v1@2095.86,77.31 ; v1@2096.18,76.99 v1@2095.86,77.31
  Bottom Layer w20: v1(2096.18,73) C4.2 ; C4.2 2096.53,146.71 R12.1@2161.22,146.71
NetJ2_3: J2.3 R20.1 | length 89.6
  Bottom Layer w25: J2.3 R20.1
NetJ3_3: J3.3 R21.1 | length 93
  Bottom Layer w25: R21.1 J3.3
NetJ4_3: J4.3 R22.1 | length 89.6
  Bottom Layer w25: J4.3 R22.1
NetJ5_3: J5.3 R23.1 | length 93
  Bottom Layer w25: R23.1 J5.3
NetJ6_3: J6.3 R24.1 | length 89.6
  Bottom Layer w25: J6.3 R24.1
NetJ7_3: J7.3 R25.1 | length 93
  Bottom Layer w25: R25.1 J7.3
NetJ8_3: J8.3 R26.1 | length 94.6
  Bottom Layer w25: J8.3 cw(c1489.3,1322.56) 1489.3,1324.63 R26.1
NetJ9_3: J9.3 R27.1 | length 94.1
  Bottom Layer w25: R27.1 J9.3
NetJ10_3: J10.3 R28.1 | length 93.4
  Bottom Layer w25: J10.3 R28.1
NetJ11_3: J11.3 R29.1 | length 94.1
  Bottom Layer w25: R29.1 J11.3
NetJ12_3: J12.3 R30.1 | length 93.4
  Bottom Layer w25: J12.3 R30.1
NetJ13_3: J13.3 R31.1 | length 94.1
  Bottom Layer w25: R31.1 J13.3
NetR3_1: R3.1 U1.10 | length 152.5
  Top Layer w20: v1@488.23,1942.03 U1.10
  Bottom Layer w20: R3.1@488.23,1900.51 v1(488.23,1941.77)
NetR3_2: R3.2 R7.1 R18.1 | length 3402.2
  Top Layer w15: v1(444,1843.64) v1(2136,1843.64)
  Bottom Layer w15: R7.1@488.23,224.84 R3.2 ; v1(2136,1843.64) R18.1
  Bottom Layer w20: v1(444,1843.64) R3.2
NetR4_1: R4.1 U2.10 | length 152.5
  Top Layer w20: U2.10 v1@868.21,119.47
  Bottom Layer w20: v1(868.21,119.73) R4.1@868.21,160.99
NetR4_2: R4.2 R14.1 R19.1 | length 3308.3
  Top Layer w15: v1(1929.16,1580.51) v1(1929.16,1736.8)
  Bottom Layer w15: R4.2 1631.38,214.86 cw(c1631.38,185.24) 1661,185.24 1661,109.49 ccw(c1692.34,109.49) 1692.34,78.15 1950.04,78.15 ccw(c1950.04,106.44) 1978.33,106.44 1978.33,201.06 ccw(c1961.52,201.06) 1961.52,217.86 R19.1 v1(1929.16,1580.51) ; v1(1929.16,1736.8) 2200.12,1736.8 ccw(c2200.12,1775.86) 2239.18,1775.86 R14.1
NetR5_2: R5.2 U1.8 | length 324
  Top Layer w20: U1.8 678.22,1904.04 ccw(c701.66,1904.04) 701.66,1880.6 830.66,1880.6 ccw(c830.66,1911.17) 861.23,1911.17 v1(861.23,1943.51)
  Bottom Layer w20: R5.2 v1(861.23,1943.51)
NetR6_1: R6.1 U1.7 | length 145.7
  Top Layer w15: U1.7 v1(717.59,1999.88)
  Bottom Layer w20: v1(717.59,1999.88) 717.91,1999.56 R6.1@717.91,1912.15
NetR7_2: R7.2 U2.8 | length 347.7
  Top Layer w20: v1(488.21,117.99) 488.21,164.25 cw(c511.82,164.25) 511.82,187.86 654.21,187.86 cw(c654.21,163.85) 678.22,163.85 U2.8
  Bottom Layer w20: v1(488.21,117.99) R7.2
NetR8_1: R8.1 U2.7 | length 141.9
  Top Layer w15: v1@638.85,73 U2.7
  Bottom Layer w20: R8.1@638.4,168.36 638.4,73.19 v1(638.59,73)
NetR9_2: R9.2 U1.6 | length 88.7
  Top Layer w15: U1.6 758.43,1943.51 v1(805.23,1943.51)
  Bottom Layer w20: R9.2 v1(805.23,1943.51)
NetR10_2: R10.2 U2.6 | length 88.7
  Top Layer w15: v1(551.21,117.99) 598.01,117.99 U2.6
  Bottom Layer w20: v1(551.21,117.99) R10.2
NetR13_1: R13.1 U3.10 | length 152.5
  Top Layer w20: v1@1866.18,1942.03 U3.10
  Bottom Layer w20: R13.1@1866.18,1900.51 v1(1866.18,1941.77)
NetR13_2: R13.2 R16.1 | length 1624.9
  Top Layer w15: v1(1866.18,1580.51) v1(1866.18,1736.8)
  Bottom Layer w15: R16.1 v1@1866.18,1579.64 ; v1(1866.18,1736.8) R13.2
NetR14_2: R14.2 U3.8 | length 318.7
  Top Layer w20: U3.8@2057.05,1941.15 2057.05,1906.39 ccw(c2081.06,1906.39) 2081.06,1882.38 2210.06,1882.38 ccw(c2210.06,1912.38) 2240.06,1912.38 v1@2240.06,1942.63
  Bottom Layer w20: R14.2 v1(2239.18,1943.51)
NetR15_1: R15.1 U3.7 | length 154.2
  Top Layer w15: U3.7 v1@2095.54,1999.88
  Bottom Layer w20: v1(2095.54,2009.88) 2095.86,2009.56 R15.1@2095.86,1913.67
NetR16_2: R16.2 U4.8 | length 348.3
  Top Layer w20: v1(1866.18,117.99) 1866.18,165.7 cw(c1888.34,165.7) 1888.34,187.86 2032.16,187.86 cw(c2032.16,163.85) 2032.32,187.86 cw(c2032.16,163.85) 2056.17,163.85 U4.8
  Bottom Layer w20: v1(1866.18,117.99) R16.2
NetR17_1: R17.1 U4.7 | length 142
  Top Layer w15: v1(2016.8,73) U4.7
  Bottom Layer w20: R17.1@2016.48,168.36 2016.48,73.32 v1(2016.8,73)
NetR18_2: R18.2 U3.6 | length 88.7
  Top Layer w15: U3.6 2136.38,1943.51 v1(2183.18,1943.51)
  Bottom Layer w20: R18.2 v1(2183.18,1943.51)
NetR19_2: R19.2 U4.6 | length 88.7
  Top Layer w15: v1(1929.16,117.99) 1975.96,117.99 U4.6
  Bottom Layer w20: v1(1929.16,117.99) R19.2
NetTP13_1: TP13.1 U4.10 | length 222.5
  Top Layer w20: U4.10 TP13.1 U4.10
pads on no net: U1.4 U2.4 U3.4 U4.4

## Polygon pours and split planes (outlines as drawn)
24V on Top Layer "24V_L01_P000" (solid, pour order 0): 1536.75,1735.98 cw(c1562.22,1735.98) 1562.22,1761.45 1800,1761.45 cw(c1800,1728.05) 1833.4,1728.05 1833.4,1572.02 1834.52,1572.02 2982,1572.02 2982,457.45 513,457.45 513,1515.11 ccw(c491.66,1515.11) 491.66,1536.45 410,1536.45 ccw(c410,1514.93) 388.47,1514.92 388.47,1481.45 205,1481.45 cw(c205,1526.45) 160,1526.45 160,1626.45 cw(c210,1626.45) 210,1676.45 566.95,1676.45 cw(c566.95,1643.92) 599.48,1643.92 599.48,1604.8 ccw(c632.26,1604.8) 632.26,1572.02 1536.75,1572.02
GND on Top Layer "GND_L01_P003" (solid, pour order 3): 3006.97,0 3006.97,303.45 0,303.45 0,0
GND on Bottom Layer "GND_L02_P001" (solid, remove dead copper, pour order 1): 0,0 0,2047.24 3006.97,2047.24 3006.97,0

## Other copper
Top Layer:
  region net GND: 1198.51,1721.45 1198.51,1663.17 cw(c1171.79,1663.17) 1171.79,1636.45 774.86,1636.45 cw(c774.25,1667.53) 743.18,1666.92 743.18,1751.09 1168.87,1751.09 cw(c1168.87,1721.45)
  region net GND: 1425.58,441.45 1425.58,334.69 ccw(c1449.85,334.69) 1449.85,310.41 1991.21,310.41 1991.21,441.45
  region net GND: 613.26,310.41 375.59,310.41 cw(c375.59,336) 350,336 350,415.45 cw(c376,415.45) 376,441.45 594.26,441.45 cw(c594.26,422.45) 613.26,422.45
  region net GND: 2121.13,1751.09 2546.82,1751.09 cw(c2546.82,1721.45) 2576.46,1721.45 2576.46,1627.91 cw(c2550,1627.91) 2550,1601.45 2255,1601.45 ccw(c2255,1586.07) 2239.62,1586.07 2239.62,1551.07 cw(c2220,1551.07) 2220,1531.45 2140.54,1531.45 cw(c2140.54,1550.86) 2121.13,1550.86
  pour cut-out: 2284.25,1572.02 2068.98,1572.02 2068.98,1240.46 2264.25,1240.46 ccw(c2264.25,1260.46) 2284.25,1260.46
  pour cut-out: 2149.25,866.76 2149.25,1118.11 cw(c2169.25,1118.11) 2169.25,1138.11 2264.25,1138.11 cw(c2264.25,1118.11) 2284.25,1118.11 2284.25,866.76 cw(c2264.25,866.76) 2264.25,846.76 2169.25,846.76 cw(c2169.25,866.76)
  pour cut-out: 2149.25,473.06 2149.25,724.41 cw(c2169.25,724.41) 2169.25,744.41 2264.25,744.41 cw(c2264.25,724.41) 2284.25,724.41 2284.25,473.06 cw(c2264.25,473.06) 2264.25,453.06 2169.25,453.06 cw(c2169.25,473.06)
  pour cut-out: 771.3,473.06 771.3,724.41 cw(c791.3,724.41) 791.3,744.41 886.3,744.41 cw(c886.3,724.41) 906.3,724.41 906.3,473.06 cw(c886.3,473.06) 886.3,453.06 791.3,453.06 cw(c791.3,473.06)
  pour cut-out: 771.3,866.76 771.3,1118.11 cw(c791.3,1118.11) 791.3,1138.11 886.3,1138.11 cw(c886.3,1118.11) 906.3,1118.11 906.3,866.76 cw(c886.3,866.76) 886.3,846.76 791.3,846.76 cw(c791.3,866.76)
  pour cut-out: 771.3,1260.46 771.3,1511.81 cw(c791.3,1511.81) 791.3,1531.81 886.3,1531.81 cw(c886.3,1511.81) 906.3,1511.81 906.3,1260.46 cw(c886.3,1260.46) 886.3,1240.46 791.3,1240.46 cw(c791.3,1260.46)
  pour cut-out: 1753.95,1341.13 1753.95,1511.81 cw(c1773.95,1511.81) 1773.95,1531.81 1868.95,1531.81 cw(c1868.95,1511.81) 1888.95,1511.81 1888.95,1341.13 cw(c1868.95,1341.13) 1868.95,1321.13 1773.95,1321.13 cw(c1773.95,1341.13)
  pour cut-out: 1753.95,947.42 1753.95,1118.11 cw(c1773.95,1118.11) 1773.95,1138.11 1868.95,1138.11 cw(c1868.95,1118.11) 1888.95,1118.11 1888.95,947.42 cw(c1868.95,947.42) 1868.95,927.42 1773.95,927.42 cw(c1773.95,947.42)
  pour cut-out: 1753.95,553.72 1753.95,724.41 cw(c1773.95,724.41) 1773.95,744.41 1868.95,744.41 cw(c1868.95,724.41) 1888.95,724.41 1888.95,553.72 cw(c1868.95,553.72) 1868.95,533.72 1773.95,533.72 cw(c1773.95,553.72)
Bottom Layer:
  rectangle net GND: 1889.15,1701.5 1902.29,1808.64
  rectangle net GND: 1797.51,1971.87 1986.22,1986.45
Multi-Layer:
  pour cut-out: -0.15,126.45 ccw(c118.11,126.45) 118.11,8.19 ccw(c118.11,126.45) 236.37,126.45 ccw(c118.11,126.45) 118.11,244.71 ccw(c118.11,126.45)
  pour cut-out: -0.15,1937.47 ccw(c118.11,1937.47) 118.11,1819.21 ccw(c118.11,1937.47) 236.37,1937.47 ccw(c118.11,1937.47) 118.11,2055.74 ccw(c118.11,1937.47)
  pour cut-out: 2770.6,1937.47 ccw(c2888.86,1937.47) 2888.86,1819.21 ccw(c2888.86,1937.47) 3007.12,1937.47 ccw(c2888.86,1937.47) 2888.86,2055.74 ccw(c2888.86,1937.47)
  pour cut-out: 2770.6,126.45 ccw(c2888.86,126.45) 2888.86,8.19 ccw(c2888.86,126.45) 3007.12,126.45 ccw(c2888.86,126.45) 2888.86,244.71 ccw(c2888.86,126.45)

## Silkscreen, mask and mechanical layers (free items; w line width, h text height)
Top Overlay:
  lines w10: 177.41,538.02 233.37,538.02 ; 177.41,638.03 233.37,638.03 233.37,538.03 ; 177.41,931.73 233.37,931.73 233.37,1031.73 177.41,1031.73 ; 177.41,1325.43 233.37,1325.43 233.37,1425.43 177.41,1425.43 ; 1178.28,537.43 1122.32,537.43 1122.32,637.44 1178.28,637.44 ; 1178.28,931.14 1122.32,931.14 1122.32,1031.14 1178.28,1031.14 ; 1178.28,1324.84 1122.32,1324.84 1122.32,1424.84 1178.28,1424.84 ; 1555.37,537.23 1611.32,537.23 1611.32,637.24 1555.37,637.24 ; 1555.37,930.94 1611.32,930.94 1611.32,1030.94 1555.37,1030.94 ; 1555.37,1324.64 1611.32,1324.64 1611.32,1424.64 1555.37,1424.64 ; 2556.23,537.43 2500.28,537.43 2500.28,637.44 2556.23,637.44 ; 2556.23,931.14 2500.28,931.14 2500.28,1031.14 2556.23,1031.14 ; 2556.23,1324.84 2500.28,1324.84 2500.28,1424.84 2556.23,1424.84
  text "LED_PCB_v1.0" at 2287.02,1979.38 h40
  text "DR02" at 1043.54,1499.13 h60
  text "DR08" at 2422.49,1499.13 h60
  text "DR01" at 176.38,1497.65 h60
  text "DR07" at 1554.33,1496.86 h60
  text "DIN" at 2712.32,1156.75 h60
  text "DR04" at 1043.09,1105.43 h60
  text "DR10" at 2422.49,1105.43 h60
  text "DR03" at 175.93,1103.94 h60
  text "DR09" at 1553.89,1103.15 h60
  text "FDIN" at 2722.23,1066.75 h60
  text "GND" at 2712.32,956.26 h60
  text "24V" at 2712.32,856.51 h60
  text "DR06" at 1043.43,711.73 h60
  text "DR12" at 2422.49,711.73 h60
  text "DR05" at 176.27,710.24 h60
  text "DR11" at 1554.22,709.45 h60
Board Outline:
  the board outline again, w10
Fabrication:
  drawing of 191 lines, arcs and shapes, not listed
  text "Layer" at 3840.34,1980 h60
  text "Name" at 4250.26,1980 h60
  text "Material" at 5180,1980 h60
  text "Thickness" at 6039.77,1980 h60
  text "Constant" at 6689.6,1980 h60
  text "Board Layer Stack" at 7259.46,1980 h60
  text "Top Overlay" at 4250.26,1860 h60
  text "Top Solder" at 4250.26,1740 h60
  text "Solder Resist" at 5180,1740 h60
  text "0.010mm" at 6039.77,1740 h60
  text "3.5" at 6689.6,1740 h60
  text "1" at 3840.34,1620 h60
  text "Top Layer" at 4250.26,1620 h60
  text "0.035mm" at 6039.77,1620 h60
  text "Dielectric 1" at 4250.26,1500 h60
  text "FR-4" at 5180,1500 h60
  text "1.500mm" at 6039.77,1500 h60
  text "4.8" at 6689.6,1500 h60
  text "2" at 3840.34,1380 h60
  text "Bottom Layer" at 4250.26,1380 h60
  text "0.035mm" at 6039.77,1380 h60
  text "Bottom Solder" at 4250.26,1260 h60
  text "Solder Resist" at 5180,1260 h60
  text "0.010mm" at 6039.77,1260 h60
  text "3.5" at 6689.6,1260 h60
  text "Bottom Overlay" at 4250.26,1140 h60
  text "Total board thickness:" at 3840.34,1020 h60
  text "1.590mm" at 6039.77,1020 h60
Drill Drawing:
  lines w10: 87.29,2780 120.62,2796.67 153.96,2780 137.29,2813.33 153.96,2846.67 120.62,2830 87.29,2846.67 103.96,2813.33 87.29,2780 ; 87.29,2946.67 103.96,2946.67 103.96,2930 137.29,2930 137.29,2946.67 153.96,2946.67 153.96,2980 137.29,2980 137.29,2996.67 103.96,2996.67 103.96,2980 87.29,2980 87.29,2946.67 ; 87.29,3096.67 103.96,3096.67 120.62,3080 137.29,3096.67 153.96,3096.67 137.29,3113.33 153.96,3130 137.29,3130 120.62,3146.67 103.96,3130 87.29,3130 103.96,3113.33 87.29,3096.67 ; 87.29,3230 87.29,3246.67 103.96,3263.33 87.29,3280 87.29,3296.67 103.96,3296.67 120.62,3280 137.29,3296.67 153.96,3296.67 153.96,3280 137.29,3263.33 153.96,3246.67 153.96,3230 137.29,3230 120.62,3246.67 103.96,3230 87.29,3230 ; 87.29,3446.67 153.96,3446.67 120.62,3380 87.29,3446.67
  lines w15: 27.5,2735 7077.59,2735 ; 27.5,3485 7077.59,3485 ; 578.38,2585 578.38,3635 ; 1168.22,2585 1168.22,3635 ; 2307.89,2585 2307.89,3635 ; 2813.76,2585 2813.76,3635 ; 3547.56,2585 3547.56,3635 ; 5047.12,2585 5047.12,3635 ; 5636.96,2585 5636.96,3635 ; 6382.76,2585 6382.76,3635 ; 27.5,2585 7077.59,2585 7077.59,3635 27.5,3635 27.5,2585
  text "Symbol" at 117.5,3530 h72
  text "Count" at 623.38,3530 h72
  text "Hole Size" at 1213.22,3530 h72
  text "Plated" at 2352.89,3530 h72
  text "Hole Type" at 2858.76,3530 h72
  text "Drill Layer Pair" at 3592.56,3530 h72
  text "Via/Pad" at 5092.12,3530 h72
  text "Pad Shape" at 5681.96,3530 h72
  text "Template" at 6427.76,3530 h72
  text "1" at 623.38,3380 h60
  text "20.47mil (0.520mm)" at 1213.22,3380 h60
  text "PTH" at 2352.89,3380 h60
  text "Round" at 2858.76,3380 h60
  text "Top Layer - Bottom Layer" at 3592.56,3380 h60
  text "Pad" at 5092.12,3380 h60
  text "Rounded" at 5681.96,3380 h60
  text "c100h52" at 6427.76,3380 h60
  text "4" at 623.38,3230 h60
  text "37.40mil (0.950mm)" at 1213.22,3230 h60
  text "PTH" at 2352.89,3230 h60
  text "Round" at 2858.76,3230 h60
  text "Top Layer - Bottom Layer" at 3592.56,3230 h60
  text "Pad" at 5092.12,3230 h60
  text "(Mixed)" at 5681.96,3230 h60
  text "(Mixed)" at 6427.76,3230 h60
  text "4" at 623.38,3080 h60
  text "122.05mil (3.100mm)" at 1213.22,3080 h60
  text "NPTH" at 2352.89,3080 h60
  text "Round" at 2858.76,3080 h60
  text "Top Layer - Bottom Layer" at 3592.56,3080 h60
  text "Pad" at 5092.12,3080 h60
  text "Rounded" at 5681.96,3080 h60
  text "c0hn310" at 6427.76,3080 h60
  text "36" at 623.38,2930 h60
  text "35.43mil (0.900mm)" at 1213.22,2930 h60
  text "PTH" at 2352.89,2930 h60
  text "Round" at 2858.76,2930 h60
  text "Top Layer - Bottom Layer" at 3592.56,2930 h60
  text "Pad" at 5092.12,2930 h60
  text "(Mixed)" at 5681.96,2930 h60
  text "(Mixed)" at 6427.76,2930 h60
  text "111" at 623.38,2780 h60
  text "11.81mil (0.300mm)" at 1213.22,2780 h60
  text "PTH" at 2352.89,2780 h60
  text "Round" at 2858.76,2780 h60
  text "Top Layer - Bottom Layer" at 3592.56,2780 h60
  text "Via" at 5092.12,2780 h60
  text "Rounded" at 5681.96,2780 h60
  text "v60h30" at 6427.76,2780 h60
  text "156 Total" at 623.38,2630 h60

## Dimensions
3006.97,2047.24 to 3006.97,0 on Dimension
0,2047.24 to 3006.97,2047.24 on Dimension